# EAGLE board EBook READER v14 (EAGLE 9.7.0)
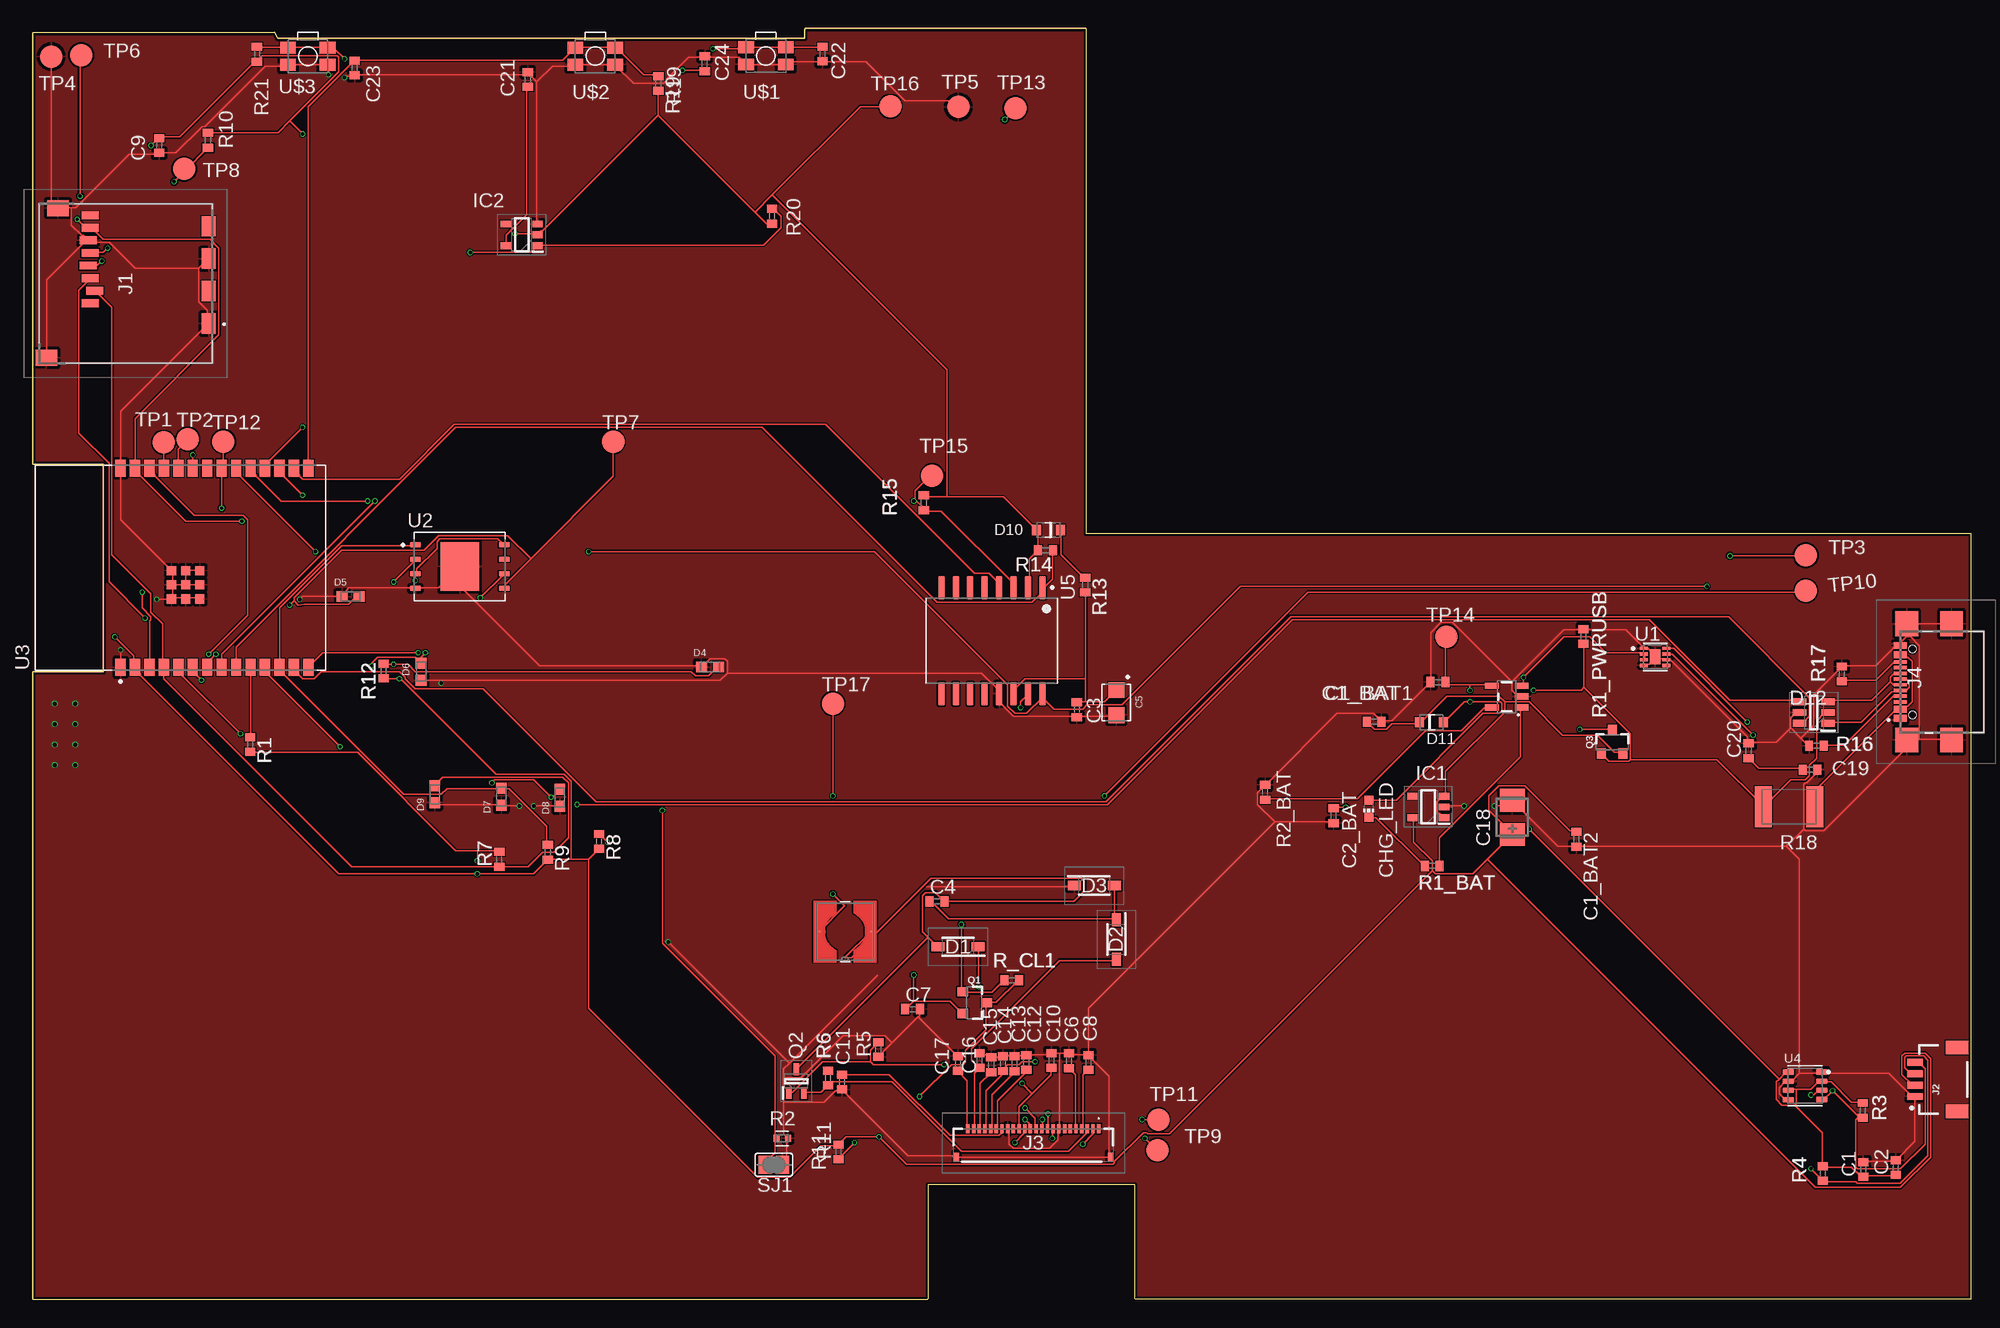
[diagram p0: board, top side]
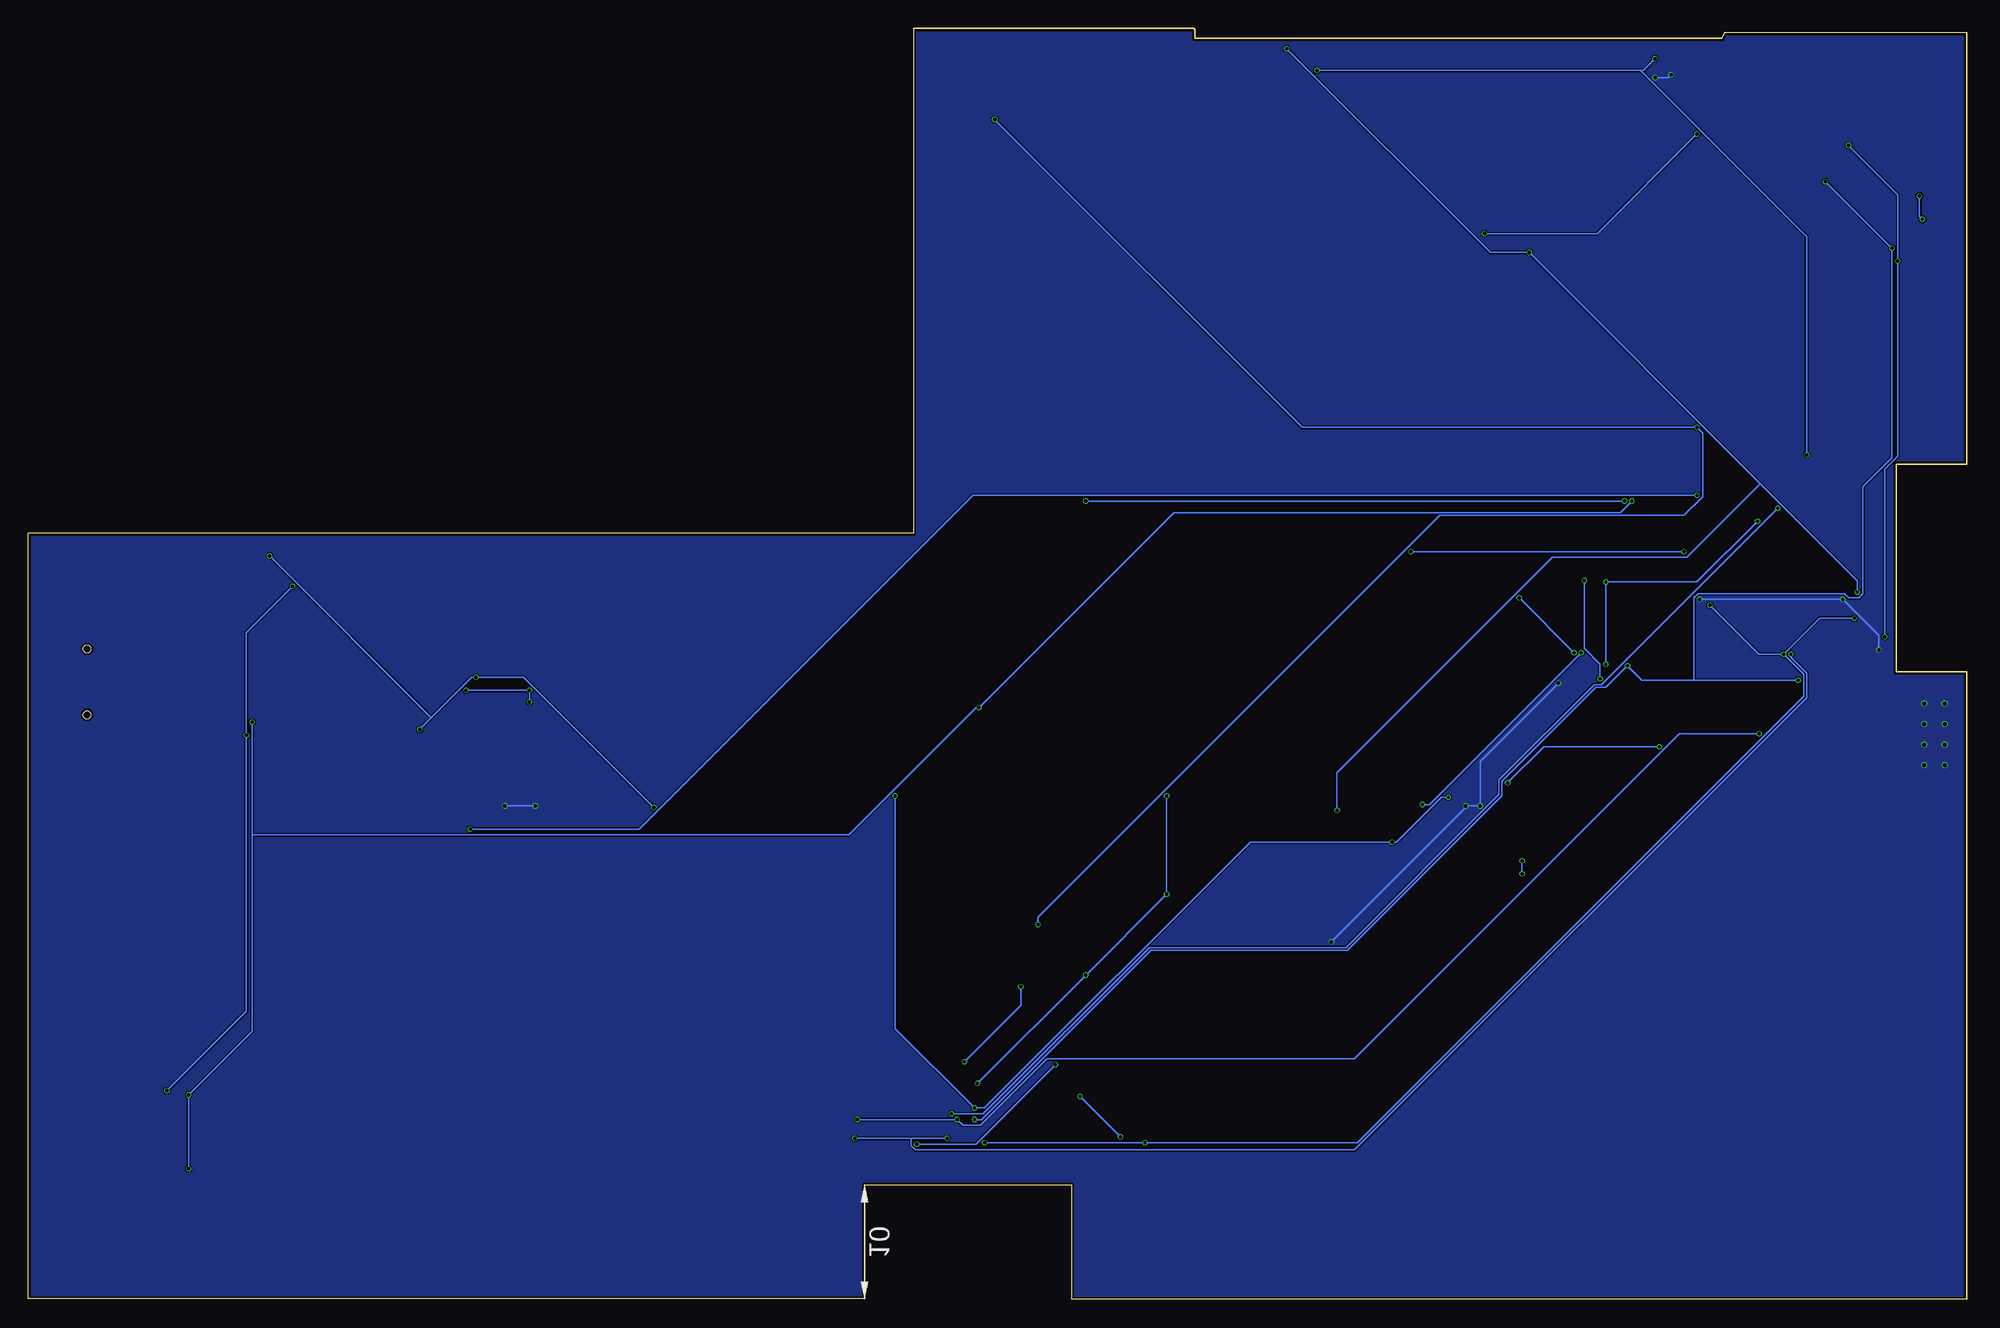
[diagram p1: board, bottom side, seen from below]

Size 170.4 x 111.69 mm. Coordinates in mm from the lower left corner, seen from the top.
Outline: 21.29,111.37 21.56,110.82 67.86,110.82 67.86,111.58 67.97,111.69 92.62,111.69 92.62,67.31 170.4,67.31 170.4,0.05 96.92,0.05 96.92,10.06 78.72,10.06 78.72,0.03 78.69,0 0,0 0,55.17 6.21,55.17 6.21,73.37 0,73.37 0,111.32 21.29,111.37
Copper layers (1*16): Top / Bottom
Stack-up Default Layer Stack: Top User Defined 0.035mm / Dielectric-1 User Defined 1.6mm / Bottom User Defined 0.035mm
Design rules: minimum copper width 5mil, minimum drill size 0.3mm, copper clearance wire_polygon to wire_polygon 5mil, copper clearance wire_polygon to pad_smd 5mil, copper clearance wire_polygon to via 5mil, copper clearance pad_smd to pad_smd 5mil, copper clearance pad_smd to via 5mil, copper clearance via to via 5mil, copper clearance smd to pad (same net) 5mil, copper clearance smd to via (same net) 5mil, copper clearance smd to smd (same net) 5mil, dimension clearance 0.2mm, via restrict clearance 0mil, restrict clearance 0mil, drill distance 6mil, keepout clearance 0mil

## Footprints (pad centres in the part's own frame; a part is rotated, then mirrored left to right if it is on the bottom)
ESP32_WROVER_EAGLE-LTSPICE_C0402 = smd 0.7 x 0.9: 1 -0.65,0; 2 0.65,0
EAGLE-LTSPICE_C0402 = smd 0.7 x 0.9: 1 -0.65,0; 2 0.65,0
CAPCP3225X100N = smd 1.4 x 1.4: 1 -1.1,0; 2 1.1,0
RCL_CT3528 = smd 2 x 2.2: + -1.5,0; - 1.5,0
ADAFRUIT_CHIP-LED0603 = smd 0.8 x 0.8: A 0,-0.75; C 0,0.75
SOD3716X135N = smd 1.15 x 0.8: 1 -1.75,0; 2 1.75,0
DIOC1608X36N = smd 0.97 x 0.94: 1 -0.75,0; 2 0.75,0
ESP32_WROVER_AVX---SD0805S020S1R0_AVX_SD0805S020S1R0_0 = smd 0.8 x 0.9: 1 -1.05,0; 2 1.05,0
SOT95P280X145-6N = smd 1.2 x 0.6: 1 -1.25,0.95; 2 -1.25,0; 3 -1.25,-0.95; 4 1.25,-0.95; 5 1.25,0; 6 1.25,0.95
SOT95P280X120-5N = smd 0.9 x 0.6: 1 -1.4,0.95; 2 -1.4,0; 3 -1.4,-0.95; 4 1.4,-0.95; 5 1.4,0.95
SOT95P280X125-5N = smd 0.9 x 0.6: 1 -1.4,0.95; 2 -1.4,0; 3 -1.4,-0.95; 4 1.4,-0.95; 5 1.4,0.95
112ATAARR03ATTEND = smd 1.8 x 1.2: G1 10.6,10.4; G2 4.9,10.4; S1 7.75,10.4; S2 2.05,10.4 | smd 1.4 x 1.9: G3 13.6,-3.85; G4 0.45,-2.85 | smd 0.7 x 1.5: P1 8.8,0; P2 7.7,0.4; P3 6.6,0; P4 5.5,-0.2; P5 4.4,0; P6 3.3,-0.2; P7 2.2,0; P8 1.1,0
JST04_1MM_RA = smd 0.6 x 1.35: 1 -1.5,0; 2 -0.5,0; 3 0.5,0; 4 1.5,0 | smd 1.2 x 2: NC1 2.8,-3.675; NC2 -2.8,-3.675
FH34SRJ24S05SH99 = smd 0.3 x 0.8: 1 5.75,1.45; 2 5.25,1.45; 3 4.75,1.45; 4 4.25,1.45; 5 3.75,1.45; 6 3.25,1.45; 7 2.75,1.45; 8 2.25,1.45; 9 1.75,1.45; 10 1.25,1.45; 11 0.75,1.45; 12 0.25,1.45; 13 -0.25,1.45; 14 -0.75,1.45; 15 -1.25,1.45; 16 -1.75,1.45; 17 -2.25,1.45; 18 -2.75,1.45; 19 -3.25,1.45; 20 -3.75,1.45; 21 -4.25,1.45; 22 -4.75,1.45; 23 -5.25,1.45; 24 -5.75,1.45 | smd 0.4 x 0.8: MP1 6.75,-1.05; MP2 -6.75,-1.05
SAMACSYS_PARTS_USB4110GFA = smd 0.3 x 1.15: A1 -3.35,3.678; A4 -2.55,3.678; A5 -1.25,3.678; A6 -0.25,3.678; A7 0.25,3.678; A8 1.25,3.678; A9 2.55,3.678; A12 3.35,3.678; B1 3.05,3.678; B4 2.25,3.678; B5 1.75,3.678; B6 0.75,3.678; B7 -0.75,3.678; B8 -1.75,3.678; B9 -2.25,3.678; B12 -3.05,3.678 | smd 2.18 x 2: MP1 -5.11,-0.827; MP2 5.11,-0.827; MP3 -5.11,3.103; MP4 5.11,3.103 | hole 0.65: -2.89,2.603; 2.89,2.603
IND_4828-WE-TPC_WRE = smd 0.127 x 0.127: 1 -2.286,0; 2 2.286,0
ESP32_WROVER_SPARKFUN-IC-POWER_SOT23-5 = smd 0.55 x 1.2: 1 -0.95,-1.3; 2 0,-1.3; 3 0.95,-1.3; 4 0.95,1.3; 5 -0.95,1.3
ESP32_WROVER_SPARKFUN-DISCRETESEMI_SOT23-3 = smd 0.8 x 0.9: 1 -0.95,-1; 2 0.95,-1; 3 0,1.1
SOT65P210X110-3N = smd 1.05 x 0.5: 1 -1.05,0.65; 2 -1.05,-0.65; 3 1.05,0
ESP32_WROVER_EAGLE-LTSPICE_R0402 = smd 0.7 x 0.9: 1 -0.65,0; 2 0.65,0
RESC1005X40 = smd 0.535 x 0.644: 1 -0.507,0; 2 0.507,0
ESP32C6_VARISTOR_CT/CN1812 = smd 1.5 x 3.6: 1 -2.25,0; 2 2.25,0
SJ = smd 1.168 x 1.6: 1 -0.762,0; 2 0.762,0
TP20R = smd 2 x 2: TP 0,0
SON50P200X200X80-9N = smd 0.76 x 0.27: 1 -0.985,0.75; 2 -0.985,0.25; 3 -0.985,-0.25; 4 -0.985,-0.75; 5 0.985,-0.75; 6 0.985,-0.25; 7 0.985,0.25; 8 0.985,0.75 | smd 0.9 x 1.3: 9 0,0
SON127P600X800X80-9N = smd 0.94 x 0.44: 1 -3.895,1.905; 2 -3.895,0.635; 3 -3.895,-0.635; 4 -3.895,-1.905; 5 3.895,-1.905; 6 3.895,-0.635; 7 3.895,0.635; 8 3.895,1.905 | smd 3.4 x 4.3: 9 0,0
XCVR_ESP32-C6-WROOM-1-N8 = smd 1.5 x 0.9: 1 -8.75,5.26; 2 -8.75,3.99; 3 -8.75,2.72; 4 -8.75,1.45; 5 -8.75,0.18; 6 -8.75,-1.09; 7 -8.75,-2.36; 8 -8.75,-3.63; 9 -8.75,-4.9; 10 -8.75,-6.17; 11 -8.75,-7.44; 12 -8.75,-8.71; 13 -8.75,-9.98; 14 -8.75,-11.25; 15 8.75,-11.25; 16 8.75,-9.98; 17 8.75,-8.71; 18 8.75,-7.44; 19 8.75,-6.17; 20 8.75,-4.9; 21 8.75,-3.63; 22 8.75,-2.36; 23 8.75,-1.09; 24 8.75,0.18; 25 8.75,1.45; 26 8.75,2.72; 27 8.75,3.99; 28 8.75,5.26 | smd 0.8 x 0.8: 29_1 -2.755,0.79; 29_2 -1.505,0.79; 29_3 -0.255,0.79; 29_4 -2.755,-0.46; 29_5 -1.505,-0.46; 29_6 -0.255,-0.46; 29_7 -2.755,-1.71; 29_8 -1.505,-1.71; 29_9 -0.255,-1.71
ESP32_WROVER_BME680_PSON80P300X300X100-8N = smd 1.016 x 0.5: 1 1.458,1.2; 2 1.458,0.4; 3 1.458,-0.4; 4 1.458,-1.2; 5 -1.458,-1.22; 6 -1.458,-0.4; 7 -1.458,0.4; 8 -1.458,1.2
SOIC127P1032X265-16N = smd 2.05 x 0.59: 1 -4.655,4.445; 2 -4.655,3.175; 3 -4.655,1.905; 4 -4.655,0.635; 5 -4.655,-0.635; 6 -4.655,-1.905; 7 -4.655,-3.175; 8 -4.655,-4.445; 9 4.655,-4.445; 10 4.655,-3.175; 11 4.655,-1.905; 12 4.655,-0.635; 13 4.655,0.635; 14 4.655,1.905; 15 4.655,3.175; 16 4.655,4.445
MYBUTTON = smd 1.4 x 1.05: 1 1.75,0.75; 2 -1.75,0.75; 3 -1.75,-0.75; 4 1.75,-0.75

## Placement (x,y rotation side)
C1  [ESP32_WROVER_EAGLE-LTSPICE_C0402]  160.93,11.41 90 top
C1_BAT  4.7uF  [ESP32_WROVER_EAGLE-LTSPICE_C0402]  123.53,54.24 180 top
C1_BAT1  4.7uF  [ESP32_WROVER_EAGLE-LTSPICE_C0402]  117.93,50.75 0 top
C1_BAT2  4.7uF  [ESP32_WROVER_EAGLE-LTSPICE_C0402]  135.7,40.43 270 top
C2  [ESP32_WROVER_EAGLE-LTSPICE_C0402]  163.79,11.59 90 top
C2_BAT  4.7uF  [ESP32_WROVER_EAGLE-LTSPICE_C0402]  114.36,42.51 270 top
C3  [EAGLE-LTSPICE_C0402]  91.79,51.82 270 top
C4  4.7uF/25V  [EAGLE-LTSPICE_C0402]  79.5,34.97 0 top
C5  CPH3225A  [CAPCP3225X100N]  95.26,52.45 270 top
C6  1uF/50V  [ESP32_WROVER_EAGLE-LTSPICE_C0402]  91.1,20.96 90 top
C7  10uF  [EAGLE-LTSPICE_C0402]  77.35,25.5 0 top
C8  1uF/50V  [ESP32_WROVER_EAGLE-LTSPICE_C0402]  92.81,20.81 90 top
C9  100nF  [EAGLE-LTSPICE_C0402]  11.12,101.4 270 top
C10  0.1uF/50V  [ESP32_WROVER_EAGLE-LTSPICE_C0402]  89.57,20.99 90 top
C11  1uF/50V  [ESP32_WROVER_EAGLE-LTSPICE_C0402]  71.15,19.1 270 top
C12  1uF/50V  [ESP32_WROVER_EAGLE-LTSPICE_C0402]  87.35,20.81 90 top
C13  1uF/50V  [ESP32_WROVER_EAGLE-LTSPICE_C0402]  86.32,20.7 90 top
C14  1uF/50V  [ESP32_WROVER_EAGLE-LTSPICE_C0402]  85.3,20.72 90 top
C15  1uF/50V  [ESP32_WROVER_EAGLE-LTSPICE_C0402]  84.27,20.61 90 top
C16  1uF/50V  [ESP32_WROVER_EAGLE-LTSPICE_C0402]  83.24,20.99 90 top
C17  1uF/50V  [ESP32_WROVER_EAGLE-LTSPICE_C0402]  81.35,20.72 90 top
C18  100uF  [RCL_CT3528]  130.07,42.36 90 top
C19  100nF  [ESP32_WROVER_EAGLE-LTSPICE_C0402]  156.25,46.54 0 top
C20  4.7uF  [ESP32_WROVER_EAGLE-LTSPICE_C0402]  150.84,48.21 90 top
C21  100nF  [ESP32_WROVER_EAGLE-LTSPICE_C0402]  43.53,107.2 90 top
C22  1uF  [ESP32_WROVER_EAGLE-LTSPICE_C0402]  69.45,109.44 270 top
C23  100nF  [ESP32_WROVER_EAGLE-LTSPICE_C0402]  28.3,108.22 270 top
C24  100nF  [ESP32_WROVER_EAGLE-LTSPICE_C0402]  59.08,108.58 90 top
CHG_LED  [ADAFRUIT_CHIP-LED0603]  117.45,43.1 180 top
D1  MBR0530  [SOD3716X135N]  81.35,30.99 180 top
D2  MBR0530  [SOD3716X135N]  95.27,31.62 270 top
D3  MBR0530  [SOD3716X135N]  93.34,36.36 0 top
D4  PGB1010603MR  [DIOC1608X36N]  59.54,55.57 0 top
D5  PGB1010603MR  [DIOC1608X36N]  27.97,61.77 0 top
D6  PGB1010603MR  [DIOC1608X36N]  34.16,55.14 90 top
D7  PGB1010603MR  [DIOC1608X36N]  41.21,44.18 90 top
D8  PGB1010603MR  [DIOC1608X36N]  46.36,44.09 90 top
D9  PGB1010603MR  [DIOC1608X36N]  35.36,44.39 90 top
D10  ESP32_WROVER_AVX---SD0805S020S1R0_AVX_SD0805S020S1R0_0_0AVX_SD0805S020S1R0_0_0  [ESP32_WROVER_AVX---SD0805S020S1R0_AVX_SD0805S020S1R0_0]  89.31,67.6 180 top
D11  ESP32_WROVER_AVX---SD0805S020S1R0_AVX_SD0805S020S1R0_0_0AVX_SD0805S020S1R0_0_0  [ESP32_WROVER_AVX---SD0805S020S1R0_AVX_SD0805S020S1R0_0]  122.97,50.71 0 top
D12  USBLC6-2SC6Y  [SOT95P280X145-6N]  156.59,51.57 180 top
IC1  XC6220A331MR-G  [SOT95P280X120-5N]  122.68,43.27 180 top
IC2  BD5229G-TR  [SOT95P280X125-5N]  42.99,93.55 180 top
J1  112A-TAAR-R03_ATTEND  [112ATAARR03ATTEND]  5.08,96.35 270 top
J2  QWIIC_RIGHT_ANGLE  [JST04_1MM_RA]  165.49,19.32 90 top
J3  FH34SRJ-24S-0.5SH_99_  [FH34SRJ24S05SH99]  87.97,13.55 0 top
J4  SAMACSYS_PARTS_USB4110-GF-A  [SAMACSYS_PARTS_USB4110GFA]  167.85,54.26 90 top
L1  744043680IND_4828-WE-TPC_WRE  [IND_4828-WE-TPC_WRE]  71.42,32.31 180 top
MCP73831  ESP32_WROVER_SPARKFUN-IC-POWER_MCP73831  [ESP32_WROVER_SPARKFUN-IC-POWER_SOT23-5]  129.58,52.97 90 top
Q1  20V/4.2A/52mΩ/1.4W  [ESP32_WROVER_SPARKFUN-DISCRETESEMI_SOT23-3]  82.77,26.07 270 top
Q2  SI1308EDL-T1-GE3  [SOT65P210X110-3N]  67.14,19.18 90 top
Q3  20V/4.2A/52mΩ/1.4W  [ESP32_WROVER_SPARKFUN-DISCRETESEMI_SOT23-3]  138.86,48.96 0 top
R1  [ESP32_WROVER_EAGLE-LTSPICE_R0402]  19.12,48.76 270 top
R1_BAT  200  [ESP32_WROVER_EAGLE-LTSPICE_R0402]  123.03,38.09 0 top
R1_PWRUSB  100K  [ESP32_WROVER_EAGLE-LTSPICE_R0402]  136.33,58.25 270 top
R2  2.2  [RESC1005X40]  65.89,14.15 180 top
R2_BAT  2K  [ESP32_WROVER_EAGLE-LTSPICE_R0402]  108.34,44.57 270 top
R3  [ESP32_WROVER_EAGLE-LTSPICE_R0402]  160.88,16.6 90 top
R4  [ESP32_WROVER_EAGLE-LTSPICE_R0402]  157.36,11.05 90 top
R5  10K  [ESP32_WROVER_EAGLE-LTSPICE_R0402]  74.34,21.96 90 top
R6  0.47  [ESP32_WROVER_EAGLE-LTSPICE_R0402]  69.92,19.45 270 top
R7  10K  [ESP32_WROVER_EAGLE-LTSPICE_R0402]  41.03,38.67 90 top
R8  10K  [ESP32_WROVER_EAGLE-LTSPICE_R0402]  49.81,40.25 270 top
R9  10K  [ESP32_WROVER_EAGLE-LTSPICE_R0402]  45.29,39.29 270 top
R10  10K  [ESP32_WROVER_EAGLE-LTSPICE_R0402]  15.42,101.86 90 top
R11  10K  [ESP32_WROVER_EAGLE-LTSPICE_R0402]  70.84,12.95 90 top
R12  10K  [ESP32_WROVER_EAGLE-LTSPICE_R0402]  30.87,55.22 270 top
R13  [ESP32_WROVER_EAGLE-LTSPICE_R0402]  92.53,62.77 270 top
R14  [ESP32_WROVER_EAGLE-LTSPICE_R0402]  89.04,65.84 180 top
R15  [ESP32_WROVER_EAGLE-LTSPICE_R0402]  78.34,70 90 top
R16  5k1  [ESP32_WROVER_EAGLE-LTSPICE_R0402]  156.81,48.65 0 top
R17  5k1  [ESP32_WROVER_EAGLE-LTSPICE_R0402]  159.05,54.96 90 top
R18  ESP32C6_VARISTORCN1812  [ESP32C6_VARISTOR_CT/CN1812]  154.4,43.28 180 top
R19  10K  [ESP32_WROVER_EAGLE-LTSPICE_R0402]  55,106.86 270 top
R20  10K  [ESP32_WROVER_EAGLE-LTSPICE_R0402]  65.01,95.19 270 top
R21  10K  [ESP32_WROVER_EAGLE-LTSPICE_R0402]  19.73,109.43 270 top
R_CL1  10K  [ESP32_WROVER_EAGLE-LTSPICE_R0402]  86.07,28.05 0 top
SJ1  [SJ]  65.16,11.82 180 top
TP1  TPTP20R  [TP20R]  11.51,75.31 0 top
TP2  TPTP20R  [TP20R]  13.64,75.59 0 top
TP3  TPTP20R  [TP20R]  155.87,65.39 0 top
TP4  TPTP20R  [TP20R]  1.63,109.22 0 top
TP5  TPTP20R  [TP20R]  81.38,104.79 0 top
TP6  TPTP20R  [TP20R]  4.27,109.34 0 top
TP7  TPTP20R  [TP20R]  51.05,75.37 0 top
TP8  TPTP20R  [TP20R]  13.32,99.34 0 top
TP9  TPTP20R  [TP20R]  98.88,13.11 0 top
TP10  TPTP20R  [TP20R]  155.88,62.27 6.1 top
TP11  TPTP20R  [TP20R]  98.96,15.78 0 top
TP12  TPTP20R  [TP20R]  16.77,75.38 0 top
TP13  TPTP20R  [TP20R]  86.39,104.68 0 top
TP14  TPTP20R  [TP20R]  124.3,58.24 0 top
TP15  TPTP20R  [TP20R]  79.07,72.37 0 top
TP16  TPTP20R  [TP20R]  75.4,104.84 0 top
TP17  TPTP20R  [TP20R]  70.36,52.35 0 top
U1  MAX17048G+T10  [SON50P200X200X80-9N]  142.63,56.46 0 top
U2  W25Q512JVEIQ  [SON127P600X800X80-9N]  37.56,64.4 0 top
U3  ESP32-C6-WROOM-1-N8  [XCVR_ESP32-C6-WROOM-1-N8]  12.99,64.3 90 top
U4  ESP32_WROVER_BME680_BME680  [ESP32_WROVER_BME680_PSON80P300X300X100-8N]  155.81,18.77 0 top
U5  DS3231SN#  [SOIC127P1032X265-16N]  84.33,57.88 270 top
U$1  BUTTON_CUSYOMV1  [MYBUTTON]  64.46,109.27 180 top
U$2  BUTTON_CUSYOMV1  [MYBUTTON]  49.46,109.26 180 top
U$3  BUTTON_CUSYOMV1  [MYBUTTON]  24.2,109.26 180 top

## Library data of the parts
C1 C1_BAT C1_BAT1 C1_BAT2 C2 C2_BAT C3 C4 C6-C17 C19-C24 = DeskAssistant v19 v1; SPICEMODEL: NONE; SPICEPREFIX: C
C5 = DeskAssistant v19 v1; AVAILABILITY: Not in stock; CHECK_PRICES: https://www.snapeda.com/parts/CPH3225A/Seiko+Instruments/view-part/?ref=eda; DESCRIPTION: 11 mF (EDLC) Supercapacitor 3.3 V 1210 (3225 Metric) - -; MF: Seiko Instruments; MP: CPH3225A; PACKAGE: 1210 Seiko; PRICE: None; PURCHASE-URL: https://www.snapeda.com/api/url_track_click_mouser/?unipart_id=562593&manufacturer=Seiko Instruments&part_name=CPH3225A&search_term=None; SNAPEDA_LINK: https://www.snapeda.com/parts/CPH3225A/Seiko+Instruments/view-part/?ref=snap
C18 = DeskAssistant v19 v1; SPICEPREFIX: C
CHG_LED R18 TP1-TP17 U$1-U$3 = DeskAssistant v19 v1
D1-D3 = DeskAssistant v19 v1; AVAILABILITY: In Stock; CHECK_PRICES: https://www.snapeda.com/parts/MBR0530/Onsemi/view-part/?ref=eda; DESCRIPTION: Diode Schottky 30 V 500mA Surface Mount SOD-123; MF: ON Semiconductor; MP: MBR0530; PACKAGE: SOD-123-2 ON Semiconductor; PRICE: None; PURCHASE-URL: https://www.snapeda.com/api/url_track_click_mouser/?unipart_id=179458&manufacturer=ON Semiconductor&part_name=MBR0530&search_term=None; SNAPEDA_LINK: https://www.snapeda.com/parts/MBR0530/Onsemi/view-part/?ref=snap
D4-D9 = DeskAssistant v19 v1; AVAILABILITY: In Stock; CHECK_PRICES: https://www.snapeda.com/parts/PGB1010603MR/Littelfuse/view-part/?ref=eda; DESCRIPTION: 150V (Typ) Clamp - Ipp Tvs Diode Surface Mount 0603 (1608 Metric); MF: Littelfuse Inc.; MP: PGB1010603MR; PACKAGE: 0603 Littelfuse Inc.; PRICE: None; PURCHASE-URL: https://www.snapeda.com/api/url_track_click_mouser/?unipart_id=5659453&manufacturer=Littelfuse Inc.&part_name=PGB1010603MR&search_term=None; SNAPEDA_LINK: https://www.snapeda.com/parts/PGB1010603MR/Littelfuse/view-part/?ref=snap
D10 D11 = DeskAssistant v19 v1; CENTROID_NOT_SPECIFIED: No; DATASHEET: http://datasheets.avx.com/schottky.pdf; DIGIKEY_DESCRIPTION: DIODE SCHOTTKY 20V 1A 0805; DIGIKEY_PART_NUMBER: 478-7800-1-ND; LEAD_FREE: yes; MF: AVX; MOUSER_PART_NUMBER: 581-SD0805S020S1R0; PACKAGE: 0805 (2012 metric); PREFIX: D; ROHS: yes; TEMPERATURE_RANGE_HIGH: +125°C; TEMPERATURE_RANGE_LOW: -55°C
D12 = DeskAssistant v19 v1; AVAILABILITY: In Stock; CHECK_PRICES: https://www.snapeda.com/parts/USBLC6-2SC6Y/STMicroelectronics/view-part/?ref=eda; DESCRIPTION: 17V Clamp 5A (8/20µs) Ipp Tvs Diode Surface Mount SOT-23-6; MF: STMicroelectronics; MP: USBLC6-2SC6Y; PACKAGE: SOT-23-6 STMicroelectronics; PRICE: None; SNAPEDA_LINK: https://www.snapeda.com/parts/USBLC6-2SC6Y/STMicroelectronics/view-part/?ref=snap
IC1 = DeskAssistant v19 v1; DESCRIPTION: LDO Voltage Regulators; HEIGHT: 1.2mm; MANUFACTURER_NAME: Torex; MANUFACTURER_PART_NUMBER: XC6220A331MR-G; MOUSER_PART_NUMBER: 865-XC6220A331MR-G; MOUSER_PRICE-STOCK: https://www.mouser.co.uk/ProductDetail/Torex-Semiconductor/XC6220A331MR-G?qs=AsjdqWjXhJ8ZSWznL1J0gg%3D%3D
IC2 = DeskAssistant v19 v1; DESCRIPTION: Voltage Detector with Adjustable Delay Time: CMOS processes are utilized to develop high precision, low current consumption CMOS reset ICs that allow arbitrary setting of the delay time. The extensive lineup includes both Nch Open Drain and CMOS output types in a wide range of detection voltages (from 2.3V to 6.0V, in 0.1V steps), enabling selection of the ideal solution based on customer requirements. In addition, the entire series is of course both lead-free and RoHS-compliant.; HEIGHT: 1.25mm; MANUFACTURER_NAME: ROHM Semiconductor; MANUFACTURER_PART_NUMBER: BD5229G-TR; MOUSER_PART_NUMBER: 755-BD5229G-TR; MOUSER_PRICE-STOCK: https://www.mouser.co.uk/ProductDetail/ROHM-Semiconductor/BD5229G-TR?qs=4kLU8WoGk0vvnhrrYwdszw%3D%3D
J1 = DeskAssistant v19 v1; DESCRIPTION: Micro SD Card Socket, Push-Push Type, Top Mount, SMT, H=1.83mm, 10u; HEIGHT: 1.9mm; MANUFACTURER_NAME: ATTEND; MANUFACTURER_PART_NUMBER: 112A-TAAR-R03 ATTEND
J2 = DeskAssistant v19 v1; PROD_ID: CONN-13694
J3 = DeskAssistant v19 v1; DESCRIPTION: 24 Position FFC, FPC Connector Contacts, Top and Bottom 0.020" (0.50mm) Surface Mount, Right Angle; HEIGHT: 1.1mm; MANUFACTURER_NAME: Hirose; MANUFACTURER_PART_NUMBER: FH34SRJ-24S-0.5SH(99); MOUSER_PART_NUMBER: 798-FH34SRJ24S05SH99; MOUSER_PRICE-STOCK: https://www.mouser.co.uk/ProductDetail/Hirose-Connector/FH34SRJ-24S-0.5SH99?qs=vcbW%252B4%252BSTIpKBl5ap9J8Fw%3D%3D
J4 = DeskAssistant v19 v1; DESCRIPTION: CONN USB 2.0 TYPE-C R/A SMT; HEIGHT: 3.26mm; MANUFACTURER_NAME: GCT (GLOBAL CONNECTOR TECHNOLOGY); MANUFACTURER_PART_NUMBER: USB4110-GF-A; MOUSER_PART_NUMBER: 640-USB4110-GF-A; MOUSER_PRICE-STOCK: https://www.mouser.co.uk/ProductDetail/GCT/USB4110-GF-A?qs=KUoIvG%2F9IlYiZvIXQjyJeA%3D%3D
L1 = DeskAssistant v19 v1; COPYRIGHT: Copyright (C) 2024 Ultra Librarian. All rights reserved.; MANUFACTURER_PART_NUMBER: 744043680; MFR_NAME: Wurth Electronics
MCP73831 = DeskAssistant v19 v1; PROD_ID: IC-09995
Q1 Q3 = DeskAssistant v19 v1; PROD_ID: TRAN-14388
Q2 = DeskAssistant v19 v1; AVAILABILITY: In Stock; CHECK_PRICES: https://www.snapeda.com/parts/SI1308EDL-T1-GE3/Vishay+Siliconix/view-part/?ref=eda; DESCRIPTION: Si1308EDL-T1-GE3 N-channel MOSFET Transistor, 1.5 A, 30 V, 3-Pin SC-70 | Siliconix / Vishay SI1308EDL-T1-GE3; MF: Vishay Siliconix; MP: SI1308EDL-T1-GE3; PACKAGE: SOT-323 Vishay Semiconductor; PRICE: None; PURCHASE-URL: https://www.snapeda.com/api/url_track_click_mouser/?unipart_id=274603&manufacturer=Vishay Siliconix&part_name=SI1308EDL-T1-GE3&search_term=None; SNAPEDA_LINK: https://www.snapeda.com/parts/SI1308EDL-T1-GE3/Vishay+Siliconix/view-part/?ref=snap
R1 R1_BAT R1_PWRUSB R2_BAT R3-R17 R19-R21 R_CL1 = DeskAssistant v19 v1; SPICEMODEL: NONE; SPICEPREFIX: R
R2 = Resistor; CATEGORY: Resistors; DESCRIPTION: Chip Resistor 1.05 X 0.54 X 0.40 mm body 0402(1005-METRIC) Package; PACKAGE_SIZE: 0402; PACKAGE_TYPE: SMD
SJ1 = jumper
U1 = DeskAssistant v19 v1; AVAILABILITY: In Stock; CHECK_PRICES: https://www.snapeda.com/parts/MAX17048G+T10/Analog+Devices/view-part/?ref=eda; DESCRIPTION: 3µA 1-Cell/2-Cell Fuel Gauge with ModelGauge; MF: Analog Devices; MP: MAX17048G+T10; PACKAGE: TDFN-8 Maxim; PRICE: None; PURCHASE-URL: https://www.snapeda.com/api/url_track_click_mouser/?unipart_id=329239&manufacturer=Analog Devices&part_name=MAX17048G+T10&search_term=None; SNAPEDA_LINK: https://www.snapeda.com/parts/MAX17048G+T10/Analog+Devices/view-part/?ref=snap
U2 = DeskAssistant v19 v1; AVAILABILITY: In Stock; CHECK_PRICES: https://www.snapeda.com/parts/W25Q512JVEIQ/Winbond+Electronics/view-part/?ref=eda; DESCRIPTION: FLASH - NOR Memory IC 512Mb (64M x 8) SPI - Quad I/O 133 MHz 8-WSON (8x6); MF: Winbond Electronics; MP: W25Q512JVEIQ; PACKAGE: Package; PRICE: None; SNAPEDA_LINK: https://www.snapeda.com/parts/W25Q512JVEIQ/Winbond+Electronics/view-part/?ref=snap
U3 = DeskAssistant v19 v1; AVAILABILITY: In Stock; CHECK_PRICES: https://www.snapeda.com/parts/ESP32-C6-WROOM-1-N8/Espressif+Systems/view-part/?ref=eda; DESCRIPTION: Multiprotocol Modules ESP32-C6 module, Wi-Fi 6 in 2.4 GHz band, Bluetooth 5, Zigbee 3.0 and Thread. ESP34-WROOM Compatible - ENGINEERING SAMPLE; MF: Espressif Systems; MP: ESP32-C6-WROOM-1-N8; PACKAGE: None; PRICE: None; SNAPEDA_LINK: https://www.snapeda.com/parts/ESP32-C6-WROOM-1-N8/Espressif+Systems/view-part/?ref=snap
U4 = DeskAssistant v19 v1; AVAILABILITY: Unavailable; DESCRIPTION: Integrated Environmental Unit; MF: Bosch Sensortec; MP: BME680; PACKAGE: LGA-8 Bosch Tools; PRICE: None
U5 = DeskAssistant v19 v1; AVAILABILITY: In Stock; CHECK_PRICES: https://www.snapeda.com/parts/DS3231SN%23/Analog+Devices/view-part/?ref=eda; DESCRIPTION: Extremely Accurate I²C-Integrated RTC/TCXO/Crystal; MF: Analog Devices; MP: DS3231SN#; PACKAGE: SOIC-16 Maxim; PRICE: None; PURCHASE-URL: https://www.snapeda.com/api/url_track_click_mouser/?unipart_id=99048&manufacturer=Analog Devices&part_name=DS3231SN#&search_term=None; SNAPEDA_LINK: https://www.snapeda.com/parts/DS3231SN%23/Analog+Devices/view-part/?ref=snap

## Nets
3V3: C1_BAT2.1 C9.1 C18.+ D10.2 IC1.5 IC2.2 J1.P4 J2.2 Q1.3 R1.2 R7.2 R8.2 R9.2 R10.2 R11.2 R12.2 R14.2 R15.2 R19.2 R20.2 R21.2 R_CL1.2 TP16.TP U2.3 U2.7 U2.8 U3.2 U5.2
12C_PW: C1.1 C2.1 R3.2 R4.2 U3.17 U4.2 U4.6 U4.8
32KHZ: R14.1 U3.9 U5.1
DN: D12.1 J4.A7 J4.B7
DP: D12.3 J4.A6 J4.B6
EPD_3V3: C7.1 C10.1 J3.15 J3.16 L1.2 Q1.2 TP17.TP
EPD_3V3_C: Q1.1 R_CL1.1 TP13.TP U3.18
EPD_BUSY: J3.9 TP9.TP U3.26
EPD_CS: D8.2 J3.12 R8.1 TP10.TP U3.11
EPD_DC: J3.11 TP11.TP U3.5
EPD_RST: J3.10 TP12.TP U3.21
FLASH_CS: D7.2 R9.1 U2.1 U3.12
GDR: J3.2 Q2.1 R5.2
GND: C1.2 C1_BAT1.2 C1_BAT2.2 C1_BAT.2 C2.2 C2_BAT.2 C3.2 C5.2 C6.2 C7.2 C8.2 C9.2 C10.2 C11.2 C12.2 C13.2 C14.2 C15.2 C16.2 C17.2 C18.- C19.2 C20.2 C21.2 C22.2 C23.2 C24.2 D3.1 D4.1 D5.1 D6.1 D7.1 D8.1 D9.1 D12.5 IC1.2 IC2.3 J1.G1 J1.G2 J1.G3 J1.G4 J1.P6 J2.1 J3.8 J3.17 J3.MP1 J3.MP2 J4.A1 J4.A12 J4.B1 J4.B12 J4.MP1 J4.MP2 J4.MP3 J4.MP4 MCP73831.2 R1_PWRUSB.1 R2.1 R2_BAT.1 R5.1 R16.1 R17.2 SJ1.1 TP4.TP TP5.TP U1.1 U1.4 U1.6 U1.9 U2.4 U2.9 U3.1 U3.28 U3.29_1 U3.29_2 U3.29_3 U3.29_4 U3.29_5 U3.29_6 U3.29_7 U3.29_8 U3.29_9 U4.1 U4.5 U4.7 U5.13 U$1.1 U$1.2 U$2.1 U$2.2 U$3.1 U$3.2
GPIO8: R1.1 U3.10
INT_RTC: R15.1 TP15.TP U3.8 U5.3
IO/BOOT: C23.1 R19.1 U3.15 U$2.3 U$2.4
IO/CHANGE: C24.1 R21.1 U3.23 U$3.3 U$3.4
MISO: D4.2 J1.P7 R12.1 TP6.TP U2.2 U3.27
MOSI: D5.2 J1.P3 J3.14 R11.1 TP7.TP U2.5 U3.7
N$1: C4.1 D2.1 D3.2
N$2: MCP73831.1 R1_BAT.2
N$3: CHG_LED.C R1_BAT.1
N$4: C1_BAT1.1 D11.1 IC1.1 IC1.3 Q3.2
N$5: MCP73831.5 R2_BAT.2
N$6: C17.1 J3.24
N$7: C21.1 IC2.5
N$8: C15.1 J3.22
N$10: C13.1 J3.20
N$11: D10.1 R13.1
N$12: C12.1 J3.19
N$13: C11.1 J3.18
N$20: C6.1 J3.5
N$21: C8.1 J3.4
N$26: J4.A5 R16.2
N$27: C19.1 C20.1
N$28: J4.B5 R17.1
PREVGH: C14.1 D1.1 J3.21
PREVGL: C16.1 D2.2 J3.23
RESE: J3.3 Q2.2 R6.2
RESE': R6.1
RESET: C22.1 IC2.1 R2.2 R20.1 SJ1.2 U3.3 U$1.3 U$1.4
RTC_RST: U3.16 U5.4
RX: TP2.TP U3.24
SCK: D6.2 J1.P5 J3.13 R10.1 TP8.TP U2.6 U3.6
SCL: J2.4 R3.1 U1.7 U3.20 U4.4 U5.16
SDA: J2.3 R4.1 U1.8 U3.19 U4.3 U5.15
SRC: C4.2 D1.2 L1.1 Q2.3
SS_SD: D9.2 J1.P2 R7.1 U3.4
TX: TP1.TP U3.25
USB_D+: D12.4 U3.14
USB_D-: D12.6 U3.13
VBAT: C2_BAT.1 MCP73831.3 Q3.3 TP3.TP U1.2 U1.3
VBUS: C1_BAT.1 CHG_LED.A D11.2 D12.2 MCP73831.4 Q3.1 R1_PWRUSB.2 R18.2 TP14.TP
VRTC: C3.1 C5.1 R13.2 U5.14
VUSB: J4.A4 J4.A9 J4.B4 J4.B9 R18.1

## Tracks (layer width: path | path; a pad name or v marks a point on that pad's centre or on a via)
3V3  (via drill 0.3)
  Top 0.127: 80.38,70.54 85.33,70.54 88.25,67.62 D10.2 88.38,67.49 88.38,65.96 R14.2 88.38,65.84 87.62,65.08 87.62,62.54 U5.2 | 80.38,70.54 78.35,70.54 R15.2 | 54.98,104.06 44.82,93.9 44.69,93.9 44.44,93.65 IC2.2 44.31,93.65 v42.41,93.65 | 54.98,104.06 54.98,106.1 R19.2 | 54.98,104.06 63.49,95.56 | 63.49,95.56 64.5,94.54 R20.2 | 63.49,95.56 65.01,97.08 | 65.01,97.08 72.76,104.83 75.3,104.83 TP16.TP | 80.38,70.54 80.38,81.71 65.01,97.08 | 123.05,37.64 123.05,38.53 121.4,40.18 121.4,42.22 IC1.5 | 123.05,37.64 123.3,37.39 126.61,37.39 127.88,38.66 | 127.88,38.66 130.04,40.82 C18.+ 130.04,40.95 128,42.98 128,44.25 128.89,45.14 131.18,45.14 135.12,41.2 135.62,41.2 C1_BAT2.1 | 127.88,38.66 156.71,9.83 164.2,9.83 166.87,12.5 166.87,21.13 166.36,21.64 164.58,21.64 164.33,21.39 164.33,19.74 165.21,18.85 165.47,18.85 J2.2 | 22.59,103.56 26.91,107.87 26.91,109.14 26.78,109.27 20.18,109.27 19.8,108.89 R21.2 19.67,108.89 12.94,102.16 11.16,102.16 C9.1 11.04,102.03 v10.4,101.4 | 22.59,103.56 21.58,102.54 15.48,102.54 R10.2 | v6.08,91.24 5.7,90.86 4.94,90.86 J1.P4 | 39.1,39.42 41.01,39.42 R7.2 | 39.1,39.42 37.2,39.42 28.56,48.06 19.16,48.06 R1.2 | U2.7 41.52,65.08 41.52,66.22 U2.8 41.39,66.35 40.88,66.85 35.8,66.85 35.55,66.6 35.55,65.96 33.77,64.19 33.77,63.81 U2.3 33.64,63.68 v33.64,63.17 | R_CL1.2 86.6,27.99 84.7,26.09 83.93,26.09 Q1.3 83.81,25.96 83.81,23.67 82.03,21.9 82.03,20.88 81.78,20.63 80.76,20.63 v77.97,17.83 | 48.88,38.66 47.36,38.66 | 47.36,38.66 45.33,38.66 R9.2 45.2,38.53 44.06,37.39 v39.1,37.39 26.91,37.39 9.51,54.79 9.51,54.92 9,55.42 U3.2 8.88,55.55 8.88,56.57 v7.23,58.22
  Top 0.127: 48.88,38.66 49.77,39.55 R8.2 | 47.36,38.66 47.36,45.52 46.72,46.15 40.75,46.15 32.37,54.53 v32.25,54.53 30.98,54.53 R12.2 | 48.88,38.66 48.88,25.58 63.74,10.72 66.54,10.72 69.33,13.51 70.73,13.51 R11.2 70.85,13.64 71.49,14.28 v74.41,14.28 76.82,11.86 94.98,11.86 95.11,11.99 95.11,12.12 97.65,14.66 97.9,14.66 98.03,14.53 99.94,14.53 123.05,37.64 | v39.1,38.53 39.1,39.42 | 22.59,103.56 v23.74,102.41
  Bottom 0.127: v10.4,101.4 6.08,97.08 v6.08,91.24 6.08,74.09 7.23,72.95 v7.23,58.22 | v74.41,14.28 v77.97,17.83 | v33.64,63.17 33.64,57.2 32.25,55.8 v32.25,54.53 | v39.1,37.39 v39.1,38.53 | v42.41,93.65 32.5,93.65 v23.74,102.41
12C_PW  (via drill 0.3)
  Top 0.127: C2.1 163.69,10.85 161.02,10.85 C1.1 160.9,10.85 160.64,10.85 159.88,11.61 157.47,11.61 R4.2 157.34,11.74 157.34,14.66 154.93,17.07 | R3.2 160.77,17.32 159.88,17.32 158.1,19.1 157.34,19.1 U4.2 157.21,19.1 156.96,19.1 156.32,18.47 155.05,18.47 | 155.05,18.47 154.42,18.47 U4.6 | 153.53,19.36 153.28,19.1 153.28,17.58 153.78,17.07 154.93,17.07 | 153.53,19.36 154.04,19.86 154.29,19.86 U4.8 | 154.93,17.07 155.05,17.2 155.05,18.47 | v23.74,70.66 21.7,72.7 21.7,72.95 U3.17 | 153.53,19.36 v131.56,41.33
  Bottom 0.127: v23.74,70.66 87.36,70.66 116.7,41.33 v131.56,41.33
32KHZ
  Top 0.127: R14.1 89.65,65.84 89.65,63.3 88.89,62.54 U5.1 88.76,62.41 88.76,62.15 87.87,61.27 79.49,61.27 64.12,76.63 37.2,76.63 17.89,57.33 U3.9
DN
  Top 0.127: J4.A7 164.2,54.41 164.83,54.41 164.96,54.28 164.96,53.77 164.71,53.52 164.2,53.52 J4.B7 164.07,53.39 163.44,53.39 160.77,50.72 157.85,50.72 D12.1
DP
  Top 0.127: 163.31,54.28 163.56,54.03 164.07,54.03 J4.A6 | 163.31,54.28 163.31,54.66 163.56,54.92 164.07,54.92 J4.B6 | 163.31,54.28 161.66,52.63 157.85,52.63 D12.3
EPD_3V3  (via drill 0.3)
  Top 0.127: J3.16 86.22,15.04 86.6,15.04 J3.15 86.73,15.04 86.73,16.94 87.87,18.09 | 87.87,18.09 89.52,19.74 89.52,20.24 C10.1 | 77.46,26.21 76.82,25.58 C7.1 | 77.46,26.21 80.63,26.21 81.65,25.2 Q1.2 | v70.35,44.25 70.35,52.26 TP17.TP | v70.35,35.61 71.36,34.6 L1.2 | 77.46,26.21 v77.46,28.5 | v86.98,18.97 87.87,18.09
  Bottom 0.127: v70.35,44.25 v70.35,35.61 v77.46,28.5 v86.98,18.97
EPD_3V3_C  (via drill 0.3)
  Top 0.127: R_CL1.1 85.33,27.99 84.32,26.98 81.78,26.98 Q1.1 81.65,27.1 v81.65,32.94 | v23.74,76.63 20.43,73.33 20.43,73.08 U3.18 | v85.46,103.68 86.35,104.57 TP13.TP
  Bottom 0.127: v85.46,103.68 58.41,76.63 v23.74,76.63 23.23,76.12 23.23,70.54 24.88,68.89 46.34,68.89 81.65,33.58 v81.65,32.94
EPD_BUSY  (via drill 0.3)
  Top 0.127: v89.65,14.15 89.65,14.91 J3.9 | v97.78,14.15 98.79,13.13 TP9.TP | v15.48,56.69 18.91,60.12 18.91,68.5 18.53,68.89 14.21,68.89 10.78,72.31 10.78,72.44 10.27,72.95 U3.26
  Bottom 0.127: v97.78,14.15 92.82,14.15 | 92.82,14.15 v89.65,14.15 | v15.48,56.69 15.48,56.44 14.08,55.04 14.08,52.88 53.84,13.13 92.44,13.13 92.82,13.51 92.82,14.15
EPD_CS  (via drill 0.3)
  Top 0.127: v87.24,16.82 88.13,15.93 88.13,15.04 J3.12 | v50.53,40.18 49.9,40.82 R8.1 | D8.2 46.34,44.76 45.71,44.12 v45.58,44.12 44.06,45.64 40.63,45.64 v40.37,45.39 | v27.04,48.57 20.43,55.17 20.43,55.42 U3.11 | v94.22,44.25 112.13,62.15 155.82,62.15 TP10.TP
  Bottom 0.127: v45.58,44.12 46.22,44.12 50.15,40.18 v50.53,40.18 62.98,40.18 86.35,16.82 v87.24,16.82 94.22,23.8 v94.22,44.25 | v27.04,48.57 37.2,48.57 v40.37,45.39
EPD_DC  (via drill 0.3)
  Top 0.127: v88.76,15.8 88.76,15.04 J3.11 | v97.52,15.8 98.92,15.8 TP11.TP | v18.28,49.71 12.81,55.17 12.81,55.42 U3.5
  Bottom 0.127: v97.52,15.8 v88.76,15.8 88.25,15.29 86.73,15.29 80.89,21.13 53.84,21.13 25.26,49.71 v18.28,49.71
EPD_RST  (via drill 0.3)
  Top 0.127: v89.27,16.31 89.27,15.04 J3.10 | v16.62,69.52 16.62,72.95 U3.21 16.62,73.08 16.75,73.2 16.75,75.36 TP12.TP
  Bottom 0.127: v89.27,16.31 86.47,16.31 71.87,30.91 54.6,30.91 41.14,44.37 41.14,45.64 32.75,54.03 32.12,54.03 v16.62,69.52
FLASH_CS
  Top 0.127: R9.1 45.2,40.06 45.2,41.58 41.9,44.88 41.26,44.88 D7.2 41.14,44.88 36.44,44.88 35.93,44.37 32.63,44.37 21.58,55.42 U3.12 21.7,60.76 27.17,66.22 33.64,66.22 U2.1
GDR  (via drill 0.3)
  Top 0.127: v92.32,13.64 93.21,14.53 93.21,14.91 J3.2 | v80.12,20.63 73.9,20.63 73.65,20.88 | 73.65,20.88 73.65,21.9 74.28,22.53 R5.2 | 73.65,20.88 69.46,20.88 66.79,18.21 66.54,18.21 Q2.1
  Bottom 0.127: v92.32,13.64 87.11,13.64 v80.12,20.63
GND  (via drill 0.3, 0.35)
  Top 0.127: U4.5 154.29,17.58 154.04,17.58 153.53,18.09 153.53,18.59 154.04,19.1 154.29,19.1 U4.7 154.42,19.23 154.67,19.23 155.31,19.86 | 155.31,19.86 157.21,19.86 U4.1 157.34,19.86 163.18,19.86 165.47,17.58 | C1.2 161.02,12.12 163.69,12.12 C2.2 163.82,12.24 165.47,13.89 165.47,17.58 | 165.47,17.58 165.47,17.7 J2.1 165.47,17.58 | v125.84,43.36 124.19,43.36 IC1.2 | v128.51,43.36 129.65,43.36 130.04,43.74 C18.- 130.16,43.74 134.1,39.8 135.62,39.8 C1_BAT2.2 135.75,39.8 154.17,39.8 | J4.B12 164.2,51.11 164.2,50.98 J4.A1 164.2,50.85 164.2,49.71 164.71,49.2 J4.MP3 | 155.69,41.33 155.69,45.26 155.82,45.39 155.94,45.39 156.83,46.28 156.83,46.53 C19.2 | 155.69,41.33 155.82,41.2 157.47,41.2 164.71,48.44 164.71,49.07 J4.MP3 | 165.85,49.2 164.83,49.2 J4.MP3 | 165.85,49.2 168.64,49.2 J4.MP1 | 155.69,41.33 154.17,39.8 | 155.31,19.86 155.31,38.66 154.17,39.8 | J3.17 85.84,14.91 85.84,13.64 86.22,13.26 89.4,13.26 90.16,14.02 90.16,14.91 J3.8 90.28,15.04 90.28,21.64 | C16.2 83.3,21.51 83.93,21.51 84.19,21.26 C15.2 84.32,21.26 85.2,21.26 C14.2 85.33,21.39 86.22,21.39 C13.2 86.35,21.39 87.24,21.39 C12.2 87.36,21.51 89.52,21.51 C10.2 89.65,21.64 90.28,21.64 | 90.28,21.64 91.05,21.64 C6.2 91.17,21.51 92.7,21.51 C8.2 | C8.2 92.82,21.39 94.6,19.61 94.6,12.62 J3.MP1 94.6,12.5 81.27,12.5 J3.MP2 81.14,12.62 76.95,12.62 71.23,18.34 C11.2 71.11,18.34 70.6,18.34 69.58,17.32 66.03,17.32 | 77.84,24.82 77.97,24.94 77.97,25.45 C7.2 | 77.84,24.82 75.55,22.53 | 75.55,22.53 74.41,21.39 R5.1 | 77.84,24.82 81.27,21.39 C17.2 | SJ1.1 66.03,11.86 66.28,12.12 66.28,14.15 R2.1 66.28,14.28 66.03,14.53 66.03,17.32
  Top 0.127: 78.6,36.25 91.55,36.25 D3.1 | 66.54,20.75 66.03,20.24 66.03,19.48 | 66.54,20.75 74.28,28.5 | 66.03,17.32 66.03,19.48 | 75.55,22.53 74.92,23.17 71.23,23.17 67.55,19.48 66.03,19.48 | 109.21,41.96 114.29,41.96 C2_BAT.2 | 109.21,41.96 107.68,43.49 107.68,44.5 108.32,45.14 R2_BAT.1 108.45,45.26 114.67,51.49 117.84,51.49 118.48,50.85 C1_BAT1.2 118.61,50.85 119.49,50.85 122.8,54.15 C1_BAT.2 122.92,54.28 122.92,58.6 123.81,59.49 124.83,59.49 130.04,54.28 | 142.61,56.31 142.74,56.44 U1.9 | 142.61,56.31 142.1,55.8 141.72,55.8 U1.4 | U1.9 142.61,56.57 141.97,57.2 141.72,57.2 U1.1 141.59,57.33 140.07,58.85 136.39,58.85 R1_PWRUSB.1 136.26,58.85 134.61,58.85 130.04,54.28 | 142.61,56.31 143.5,56.31 U1.6 143.62,56.19 144.01,56.19 150.74,49.45 150.74,48.95 C20.2 150.86,48.95 153.28,48.95 154.55,50.22 | 142.61,56.31 U1.9 | 130.04,54.28 130.04,53.52 130.54,53.01 130.8,53.01 MCP73831.2 | 154.55,50.22 155.44,49.33 | 155.44,49.33 156.07,48.69 R16.1 | 154.55,50.22 154.55,51.11 154.93,51.49 155.31,51.49 D12.5 | 164.71,58.22 164.71,59.36 J4.MP4 164.83,59.36 168.64,59.36 J4.MP2 | 164.71,58.22 164.2,57.71 J4.A12 164.2,57.58 164.2,57.33 J4.B1 164.07,57.2 163.56,57.2 162.04,55.68 159.12,55.68 R17.2 158.99,55.55 156.58,53.14 156.58,50.47 155.44,49.33 | 109.21,41.96 92.82,25.58 92.82,21.51 C8.2 | 165.85,49.2 165.85,57.46 165.09,58.22 164.71,58.22 | 36.69,63.55 37.45,64.31 U2.9 36.69,63.55 | 36.69,63.55 35.67,62.54 33.77,62.54 U2.4 33.64,62.54 27.76,62.54 D5.1 23.74,61.77 v23.48,61.52 | C5.2 95.24,51.23 91.81,51.23 C3.2 91.68,51.23 86.22,51.23 85.08,52.38 85.08,53.14 U5.13 84.95,53.26 84.95,53.52 83.43,55.04 61.07,55.04
  Top 0.127: D9.1 35.42,43.61 35.55,43.49 41.14,43.49 D7.1 41.26,43.36 v42.79,43.36 | v44.06,43.36 46.34,43.36 D8.1 | 35.93,54.41 60.44,54.41 61.07,55.04 | 35.93,54.41 34.28,54.41 D6.1 | 61.07,55.04 61.07,56.06 60.82,56.31 59.55,56.31 58.92,55.68 D4.1 58.79,55.68 44.56,55.68 36.69,63.55 | 35.93,54.41 v35.93,54.15 | TP5.TP 81.1,105.33 76.7,105.33 73.27,108.76 69.46,108.76 C22.2 69.33,108.76 66.41,108.76 66.28,108.64 U$1.2 66.15,108.51 62.73,108.51 U$1.1 62.6,108.64 62.09,109.14 59.17,109.14 C24.2 59.04,109.14 57.65,109.14 55.74,107.24 55.74,107.11 55.49,106.86 52.82,106.86 51.3,108.38 U$2.2 51.17,108.51 47.74,108.51 U$2.1 47.61,108.38 45.71,108.38 44.31,106.99 | 44.31,106.99 44.31,94.54 IC2.3 | 44.31,106.99 43.55,107.75 C21.2 43.42,107.75 43.29,107.62 28.31,107.62 C23.2 28.18,107.49 27.55,107.49 v27.42,107.37 | U3.29_5 13.58,62.79 14.59,62.79 U3.29_8 | U3.29_9 14.59,64.06 13.58,64.06 U3.29_6 13.45,63.93 13.45,62.92 U3.29_5 | U3.29_7 14.59,61.65 13.58,61.65 U3.29_4 13.45,61.65 12.31,61.65 | 12.31,62.79 12.31,61.65 | 12.31,61.65 U3.29_1 12.18,61.52 v10.91,61.52 | v7.73,57.07 U3.1 | 12.31,62.79 U3.29_5 | 12.31,62.79 U3.29_2 12.31,62.92 12.31,63.93 U3.29_3 12.18,64.06 7.73,68.5 7.73,72.95 U3.28 7.73,73.08 7.73,78.03 15.35,85.65 J1.G1 15.35,85.78 15.35,86.92 14.59,87.68 14.59,90.6 | 14.59,90.6 15.35,91.36 J1.G2 | 3.42,95.94 2.27,95.94 J1.G4 2.15,95.94 1.64,96.44 1.64,109.14 TP4.TP | 3.42,95.94 3.8,95.94 8.5,100.64 11.04,100.64 C9.2 11.16,100.76 12.6,100.76 14.89,103.06 15.11,103.06 20.43,108.38 22.34,108.38 U$3.1 22.47,108.51 25.9,108.51 U$3.2 26.02,108.38 v26.02,107.62
  Top 0.127: 4.81,93.14 4.43,93.52 4.31,93.52 3.42,94.41 3.42,95.94 | 4.81,93.14 1.26,89.59 1.26,82.86 J1.G3 | 4.81,93.14 J1.P6 4.94,93.02 5.07,92.89 6.72,92.89 9,90.6 14.59,90.6 | v55.87,31.42 66.54,20.75
  Bottom 0.127: v128.51,43.36 v125.84,43.36 | 43.93,43.36 v42.79,43.36 42.79,47.3 v35.93,54.15 | v7.73,57.07 7.73,58.34 v10.91,61.52 v23.48,61.52 | v27.42,107.37 26.28,107.37 v26.02,107.62 | 43.93,43.36 v55.87,31.42 | 43.93,43.36 v44.06,43.36
  other vias: 3.75,52.36 1.95,52.36 3.75,50.56 1.95,50.56 3.75,48.76 1.95,48.76 3.75,46.96 1.95,46.96
  pour Top: 0.07,111.24 20.96,111.24 21.48,110.72 68.03,110.72 68.03,111.55 68.01,111.56 92.53,111.56 92.57,111.53 92.57,67.23 92.59,67.2 170.35,67.2 170.35,67.2 170.35,0.09 170.35,0.09 97.01,0.09 96.97,0.12 96.97,10.11 96.96,10.13 78.67,10.13 78.64,10.1 78.68,10.06 78.68,0.05 0.1,0.05 0.1,0.04 0.1,55.06 6.31,55.06 6.33,55.08 6.33,73.44 6.3,73.48 0.12,73.48 0.1,73.49 0.1,111.17 0.08,111.2 0.08,111.24 0.08,111.24
  pour Bottom: 0.08,111.24 0.09,111.22 0.09,73.47 0.1,73.47 6.29,73.47 6.31,73.45 6.31,55.04 0.12,55.04 0.11,55.05 0.11,0.06 0.13,0.04 78.65,0.04 78.65,10.14 97,10.14 96.99,10.14 96.96,10.11 96.99,10.09 96.99,0.1 170.33,0.1 170.35,0.08 170.35,67.22 170.33,67.23 92.55,67.23 92.55,67.23 92.55,111.55 92.53,111.56 92.53,111.55 68.01,111.55 68.01,110.73 67.99,110.71 67.99,110.72 21.51,110.72 20.98,111.24 20.98,111.26 20.96,111.24 0.08,111.24 0.07,111.24 0.08,111.24 0.08,111.23 0.08,111.24 0.08,111.24 0.07,111.24 0.07,111.24
GPIO8
  Top 0.127: R1.1 19.16,49.45 19.16,55.42 U3.10
INT_RTC  (via drill 0.3)
  Top 0.127: 77.58,70.28 78.22,69.65 78.22,69.39 R15.1 78.35,69.27 79.87,69.27 86.22,62.92 86.22,62.54 U5.3 | 77.58,70.28 77.58,71.04 78.98,72.44 TP15.TP | v30.09,70.16 16.62,56.69 U3.8 | 77.58,70.28 v77.46,70.16
  Bottom 0.127: v77.46,70.16 v30.09,70.16
IO/BOOT
  Top 0.127: R19.1 54.98,107.62 53.71,107.62 51.3,110.03 U$2.3 51.17,110.03 47.74,110.03 U$2.4 47.61,109.91 46.6,108.89 28.31,108.89 C23.1 28.18,108.76 24.24,104.83 24.24,73.08 U3.15
IO/CHANGE  (via drill 0.3)
  Top 0.127: R21.1 19.8,110.03 22.34,110.03 U$3.4 22.47,110.03 25.9,110.03 U$3.3 26.02,109.91 26.53,109.91 v27.42,109.02 | v57.14,108 59.04,108 C24.1 | v14.08,74.22 14.08,73.08 U3.23
  Bottom 0.127: 28.69,108 28.44,108 v27.42,109.02 | 28.69,108 v57.14,108 | v14.08,74.22 14.08,93.4 28.69,108
MISO  (via drill 0.3)
  Top 0.127: R12.1 30.98,55.8 v31.74,55.8 33.01,55.8 33.64,55.17 57.9,55.17 58.28,54.79 59.42,54.79 60.19,55.55 D4.2 | v31.74,63.04 33.64,64.95 U2.2 | v4.18,96.95 4.18,109.27 TP6.TP | v3.92,94.92 4.69,94.16 J1.P7 5.19,94.16 6.21,93.14 15.61,93.14 16.37,92.38 16.37,84.76 9,77.39 9,73.08 U3.27 8.88,72.95 13.45,68.38 v18.4,68.38
  Bottom 0.127: v31.74,55.8 v31.74,63.04 23.74,63.04 v18.4,68.38 | v4.18,96.95 4.18,95.17 v3.92,94.92
MOSI  (via drill 0.3)
  Top 0.127: v86.35,13.77 87.11,14.53 87.11,14.91 J3.14 | v72.25,13.77 70.85,12.37 R11.1 | 43.8,65.08 51.04,72.31 TP7.TP | 43.8,65.08 41.52,62.79 41.52,62.54 U2.5 | 22.97,61.39 23.36,61.01 23.88,61.11 27.78,61.11 28.45,61.77 D5.2 | 22.97,61.39 22.97,61.65 27.17,65.84 34.4,65.84 35.67,67.11 41.77,67.11 43.8,65.08 | v16.12,56.69 15.35,55.93 U3.7 | 22.97,61.39 v22.59,61.01 | v9.89,59.87 6.72,63.04 6.72,73.46 4.05,76.12 4.05,88.7 5.07,89.71 J1.P3
  Bottom 0.127: v86.35,13.77 v72.25,13.77 53.58,13.77 14.34,53.01 14.34,54.92 v16.12,56.69 | v16.12,56.69 18.28,56.69 v22.59,61.01 | v9.89,59.87 12.94,59.87 v16.12,56.69
N$1
  Top 0.127: 95.11,33.45 95.24,33.45 D2.1 95.11,33.45 | 95.11,33.45 80.51,33.45 79.11,34.85 78.85,34.85 C4.1 | 95.11,33.45 95.11,36.25 D3.2
N$2
  Top 0.127: R1_BAT.2 123.69,38.15 123.69,40.56 130.8,47.68 130.8,51.99 MCP73831.1
N$3
  Top 0.127: CHG_LED.C 118.1,42.34 122.29,38.15 R1_BAT.1
N$4
  Top 0.127: IC1.1 124.07,42.34 123.69,42.72 123.56,42.72 123.43,42.85 123.43,43.74 123.81,44.12 124.07,44.12 IC1.3 124.19,44.25 124.19,46.41 129.4,51.61 129.4,52.5 | C1_BAT1.1 117.34,50.72 117.97,50.09 118.99,50.09 119.49,50.6 121.91,50.6 D11.1 122.03,50.72 124.32,53.01 128.89,53.01 129.4,52.5 | 129.4,52.5 131.56,52.5 134.48,49.58 137.53,49.58 139.05,48.06 139.69,48.06 Q3.2
N$5
  Top 0.127: R2_BAT.2 108.45,43.99 116.45,43.99 122.42,49.96 125.59,49.96 127.62,51.99 128.26,51.99 MCP73831.5
N$6
  Top 0.127: J3.24 82.16,15.04 82.16,19.23 81.39,19.99 C17.1
N$7
  Top 0.127: IC2.5 41.64,92.63 41.64,93.52 43.42,95.3 43.42,106.48 C21.1
N$8
  Top 0.127: J3.22 83.3,15.04 83.3,18.97 84.19,19.86 C15.1
N$10
  Top 0.127: J3.20 84.32,15.04 84.32,17.96 86.35,19.99 C13.1
N$11
  Top 0.127: D10.1 90.41,67.49 90.41,65.46 92.44,63.42 R13.1
N$12
  Top 0.127: J3.19 84.82,15.04 84.82,17.45 87.24,19.86 87.24,20.12 C12.1
N$13
  Top 0.127: J3.18 85.2,14.91 85.2,14.66 84.95,14.4 80.63,14.4 75.3,19.74 71.23,19.74 C11.1
N$20
  Top 0.127: J3.5 91.68,15.04 91.68,19.74 91.17,20.24 C6.1
N$21
  Top 0.127: J3.4 92.32,15.04 92.32,19.74 92.7,20.12 C8.1
N$26
  Top 0.127: R16.2 157.47,48.69 159.25,48.69 163.56,53.01 164.07,53.01 J4.A5
N$27
  Top 0.127: C19.1 155.56,46.66 151.75,46.66 150.86,47.55 C20.1
N$28
  Top 0.127: R17.1 159.12,54.41 162.04,54.41 163.56,55.93 164.07,55.93 J4.B5
PREVGH  (via drill 0.3)
  Top 0.127: J3.21 83.81,15.04 83.81,18.34 85.2,19.74 85.2,19.99 C14.1 85.2,20.12 85.71,20.63 86.73,20.63 86.98,20.88 v88.13,20.88 | v83.17,27.48 83.17,30.91 D1.1
  Bottom 0.127: v83.17,27.48 83.17,25.83 v88.13,20.88
PREVGL
  Top 0.127: J3.23 82.79,15.04 82.79,19.86 83.17,20.24 C16.1 83.17,20.37 82.54,21.01 82.54,22.02 90.28,29.77 95.24,29.77 D2.2
RESE
  Top 0.127: J3.3 92.7,14.91 92.7,14.66 91.05,13.01 81.65,13.01 75.55,19.1 70.22,19.1 69.96,18.85 R6.2 69.84,18.72 69.33,18.21 67.81,18.21 Q2.2
RESET  (via drill 0.3)
  Top 0.127: C22.1 69.33,110.03 66.28,110.03 U$1.3 66.15,110.03 62.73,110.03 U$1.4 62.6,109.91 v59.8,109.91 | SJ1.2 64.5,11.86 64.5,12.12 65.27,12.88 65.27,14.15 R2.2 65.27,14.28 65.27,21.39 55.36,31.29 v55.36,42.98 | R20.1 65.14,95.81 65.77,95.17 65.77,94.16 64.25,92.63 44.44,92.63 IC2.1 44.31,92.51 43.8,92 v38.47,92 | v9.64,62.15 9.64,60.76 10.4,60 10.4,59.74 10.27,59.61 U3.3
  Bottom 0.127: v9.64,62.15 9.64,63.17 18.15,71.68 | 18.15,71.68 v38.47,92 41.9,92 v59.8,109.91 | v55.36,42.98 55.36,46.28 36.44,65.2 24.63,65.2 18.15,71.68
RTC_RST
  Top 0.127: U3.16 22.97,72.95 23.48,72.44 23.48,72.31 23.74,72.06 32.25,72.06 37.07,76.89 69.71,76.89 82.79,63.81 84.06,63.81 84.95,62.92 84.95,62.54 U5.4
RX
  Top 0.127: U3.24 12.81,73.08 12.81,74.73 13.58,75.49 TP2.TP
SCK  (via drill 0.3)
  Top 0.127: 13.45,99.24 15.35,101.14 R10.1 | v6.59,92.38 6.21,92 5.19,92 J1.P5 | 13.45,99.24 v12.43,98.22 | 13.45,99.24 TP8.TP | v87.24,15.8 87.62,15.42 87.62,15.04 J3.13 | v29.83,55.68 29.83,55.93 30.34,56.44 33.64,56.44 33.9,56.19 | 33.9,56.19 34.15,55.93 D6.2 33.9,56.19 | v39.36,61.65 41.39,63.68 U2.6 | 33.9,56.19 v34.53,56.82 | v14.85,54.41 14.08,55.17 14.08,55.42 U3.6
  Bottom 0.127: v12.43,98.22 v6.59,92.38 6.59,73.97 9.13,71.43 9.13,62.03 9.51,61.65 10.4,61.65 10.78,62.03 23.61,62.03 23.99,61.65 23.99,54.41 | v87.24,15.8 86.6,15.8 71.74,30.66 54.47,30.66 40.88,44.25 40.88,45.52 32.63,53.77 31.74,53.77 v29.83,55.68 28.56,54.41 23.99,54.41 | v34.53,56.82 v39.36,61.65 | 23.99,54.41 v14.85,54.41
SCL  (via drill 0.3)
  Top 0.127: v151.24,49.58 144.13,56.69 143.62,56.69 U1.7 | U4.4 157.34,17.45 v158.23,18.34 160.52,16.05 | 160.52,16.05 160.77,16.05 R3.1 160.52,16.05 | 160.52,16.05 160.26,15.8 160.26,11.61 160.39,11.48 164.2,11.48 166.36,13.64 166.36,20.24 165.85,20.75 165.6,20.75 J2.4 | v24.88,65.71 17.89,72.7 17.89,72.95 U3.20 | v48.88,65.71 74.03,65.71 85.71,54.03 85.71,52.12 86.35,51.49 87.36,51.49 88.76,52.88 | 88.76,52.88 88.76,53.14 U5.16 88.76,52.88 | v147.18,62.66 106.16,62.66 95.75,52.25 92.7,52.25 92.32,51.87 89.78,51.87 88.76,52.88
  Bottom 0.127: v158.23,18.34 151.24,25.32 v151.24,49.58 151.24,58.6 v147.18,62.66 | v48.88,65.71 v24.88,65.71
SDA  (via drill 0.3)
  Top 0.127: J2.3 165.47,19.86 165.09,19.86 164.58,20.37 164.58,21.26 164.71,21.39 166.23,21.39 166.61,21.01 166.61,12.62 164.2,10.21 160.39,10.21 160.26,10.34 157.47,10.34 R4.1 157.34,10.47 v156.32,11.48 | v150.74,50.72 144.26,57.2 U1.8 | v156.32,17.96 156.58,17.96 156.96,18.34 157.21,18.34 U4.3 | v29.45,70.16 21.83,70.16 19.67,72.31 19.67,72.44 19.16,72.95 U3.19 | v86.86,51.99 86.86,52.5 87.49,53.14 U5.15
  Bottom 0.127: 150.74,40.82 150.74,23.55 v156.32,17.96 v156.32,11.48 | 150.74,40.82 v150.74,50.72 | v29.45,70.16 30.47,69.14 69.71,69.14 v86.86,51.99 87.11,51.99 98.29,40.82 150.74,40.82
SRC
  Top 0.127: 78.73,31.8 79.49,31.04 D1.2 | 78.73,31.8 78.22,32.31 78.22,35.48 78.47,35.74 79.36,35.74 80.12,34.98 C4.2 80.25,34.98 91.55,34.98 92.44,35.87 92.44,36.75 92.19,37.01 78.98,37.01 72,30.02 71.36,30.02 L1.1 | 78.73,31.8 67.17,20.24 Q2.3
SS_SD
  Top 0.127: D9.2 35.42,45.26 36.06,45.9 46.6,45.9 47.1,45.39 47.1,40.56 45.83,39.29 44.82,39.29 43.55,38.02 41.14,38.02 R7.1 41.01,38.02 28.05,38.02 11.54,54.53 11.54,55.42 U3.4 11.42,55.55 11.42,59.36 10.4,60.38 10.4,62.03 6.97,65.46 6.97,87.17 5.58,88.57 J1.P2
TX
  Top 0.127: U3.25 11.54,73.08 11.54,75.24 TP1.TP
USB_D+  (via drill 0.3)
  Top 0.127: v47.87,43.49 94.48,43.49 110.73,59.74 142.1,59.74 149.21,52.63 155.31,52.63 D12.4 | v33.9,56.82 25.51,56.82 U3.14
  Bottom 0.127: v47.87,43.49 47.23,43.49 v33.9,56.82
USB_D-
  Top 0.127: D12.6 155.44,50.72 155.69,50.72 156.2,51.23 156.2,52.88 149.09,60 110.6,60 94.35,43.74 49.52,43.74 39.61,53.65 33.64,53.65 32.75,54.53 32.75,54.66 32.25,55.17 25.39,55.17 24.75,54.53 23.74,54.53 22.85,55.42 U3.13
VBAT  (via drill 0.3)
  Top 0.127: U1.3 141.72,56.31 141.72,56.69 U1.2 141.59,56.82 138.29,56.82 136.89,58.22 134.61,58.22 v131.05,54.66 131.05,54.15 130.92,54.03 MCP73831.3 | v115.43,43.23 114.41,43.23 C2_BAT.1 | v136,50.09 138.8,50.09 Q3.3 | v149.21,65.33 155.82,65.33 TP3.TP
  Bottom 0.127: v115.43,43.23 126.86,54.66 v131.05,54.66 131.43,54.66 134.99,51.11 | 134.99,51.11 v136,50.09 | 134.99,51.11 v149.21,65.33
VBUS  (via drill 0.3)
  Top 0.127: TP14.TP 124.19,58.22 124.19,54.28 C1_BAT.1 124.19,54.15 124.32,54.03 126.35,54.03 | 126.35,54.03 128.26,54.03 MCP73831.4 | CHG_LED.A 117.46,43.87 119.88,43.87 127.5,51.49 128.89,51.49 129.15,51.74 129.15,52.38 129.02,52.5 v126.35,52.5 125.84,52.5 124.07,50.72 D11.2 | v126.35,53.52 126.35,54.03 | 136.39,53.77 136.39,57.58 R1_PWRUSB.2 | 136.39,53.77 140.45,49.71 140.45,47.42 | 140.45,47.42 140.32,47.3 138.54,47.3 137.91,47.93 Q3.1 | D12.2 157.72,51.49 157.47,51.49 156.83,50.85 156.83,47.55 156.2,46.91 156.2,46.03 155.82,45.64 154.55,45.64 152.26,43.36 R18.2 152.13,43.36 148.07,47.42 140.45,47.42 | v131.94,53.52 136.13,53.52 136.39,53.77
  Bottom 0.127: v126.35,52.5 v126.35,53.52 v131.94,53.52
VRTC
  Top 0.127: 92.57,52.5 94.22,52.5 95.24,53.52 C5.1 | 92.57,52.5 91.81,52.5 C3.1 | 92.57,52.5 92.57,54.53 | 92.57,54.53 92.57,62.03 R13.2 | 92.57,54.53 87.24,54.53 86.35,53.65 86.35,53.26 U5.14
VUSB
  Top 0.127: J4.A9 164.2,56.69 164.2,56.57 J4.B4 164.2,56.44 164.83,56.44 165.21,56.06 165.21,52.5 164.83,52.12 164.2,52.12 J4.B9 164.2,51.99 164.2,51.74 J4.A4 164.07,51.61 163.56,51.61 156.71,44.76 156.71,43.36 R18.1